# Altium PCB LM-008.PcbDoc (part 1 of 3)
Units mil, origin at the board's own origin, x right, y up, seen from the top; angles counter-clockwise.
Board outline 2639.74 x 2756.53 mil, 2 copper layers (Top Layer, Bottom Layer); 59 components, 36 nets, 707 pads, 397 vias.
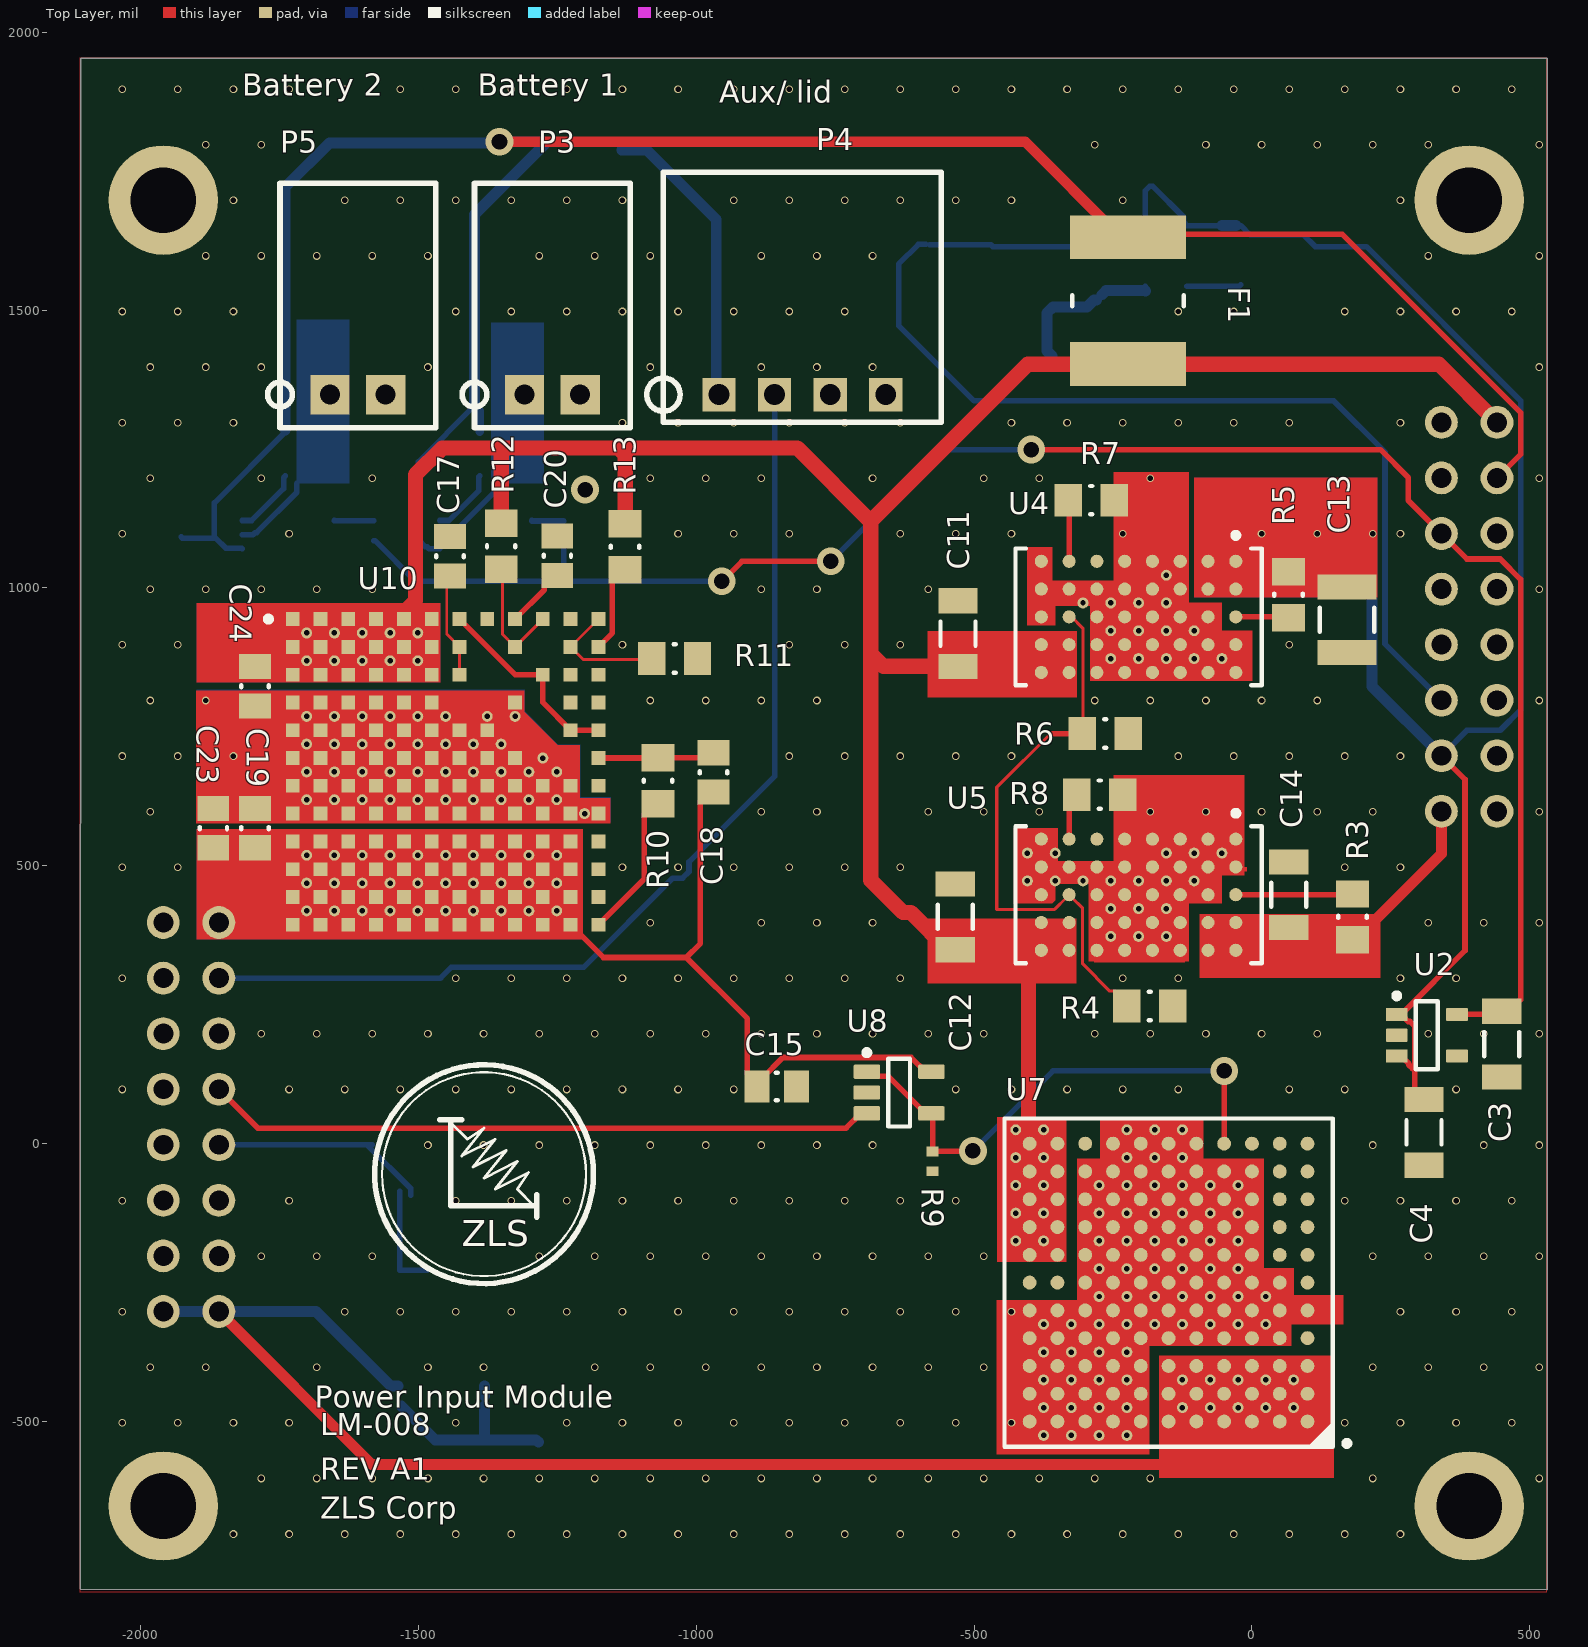
[diagram p0: Top Layer view]
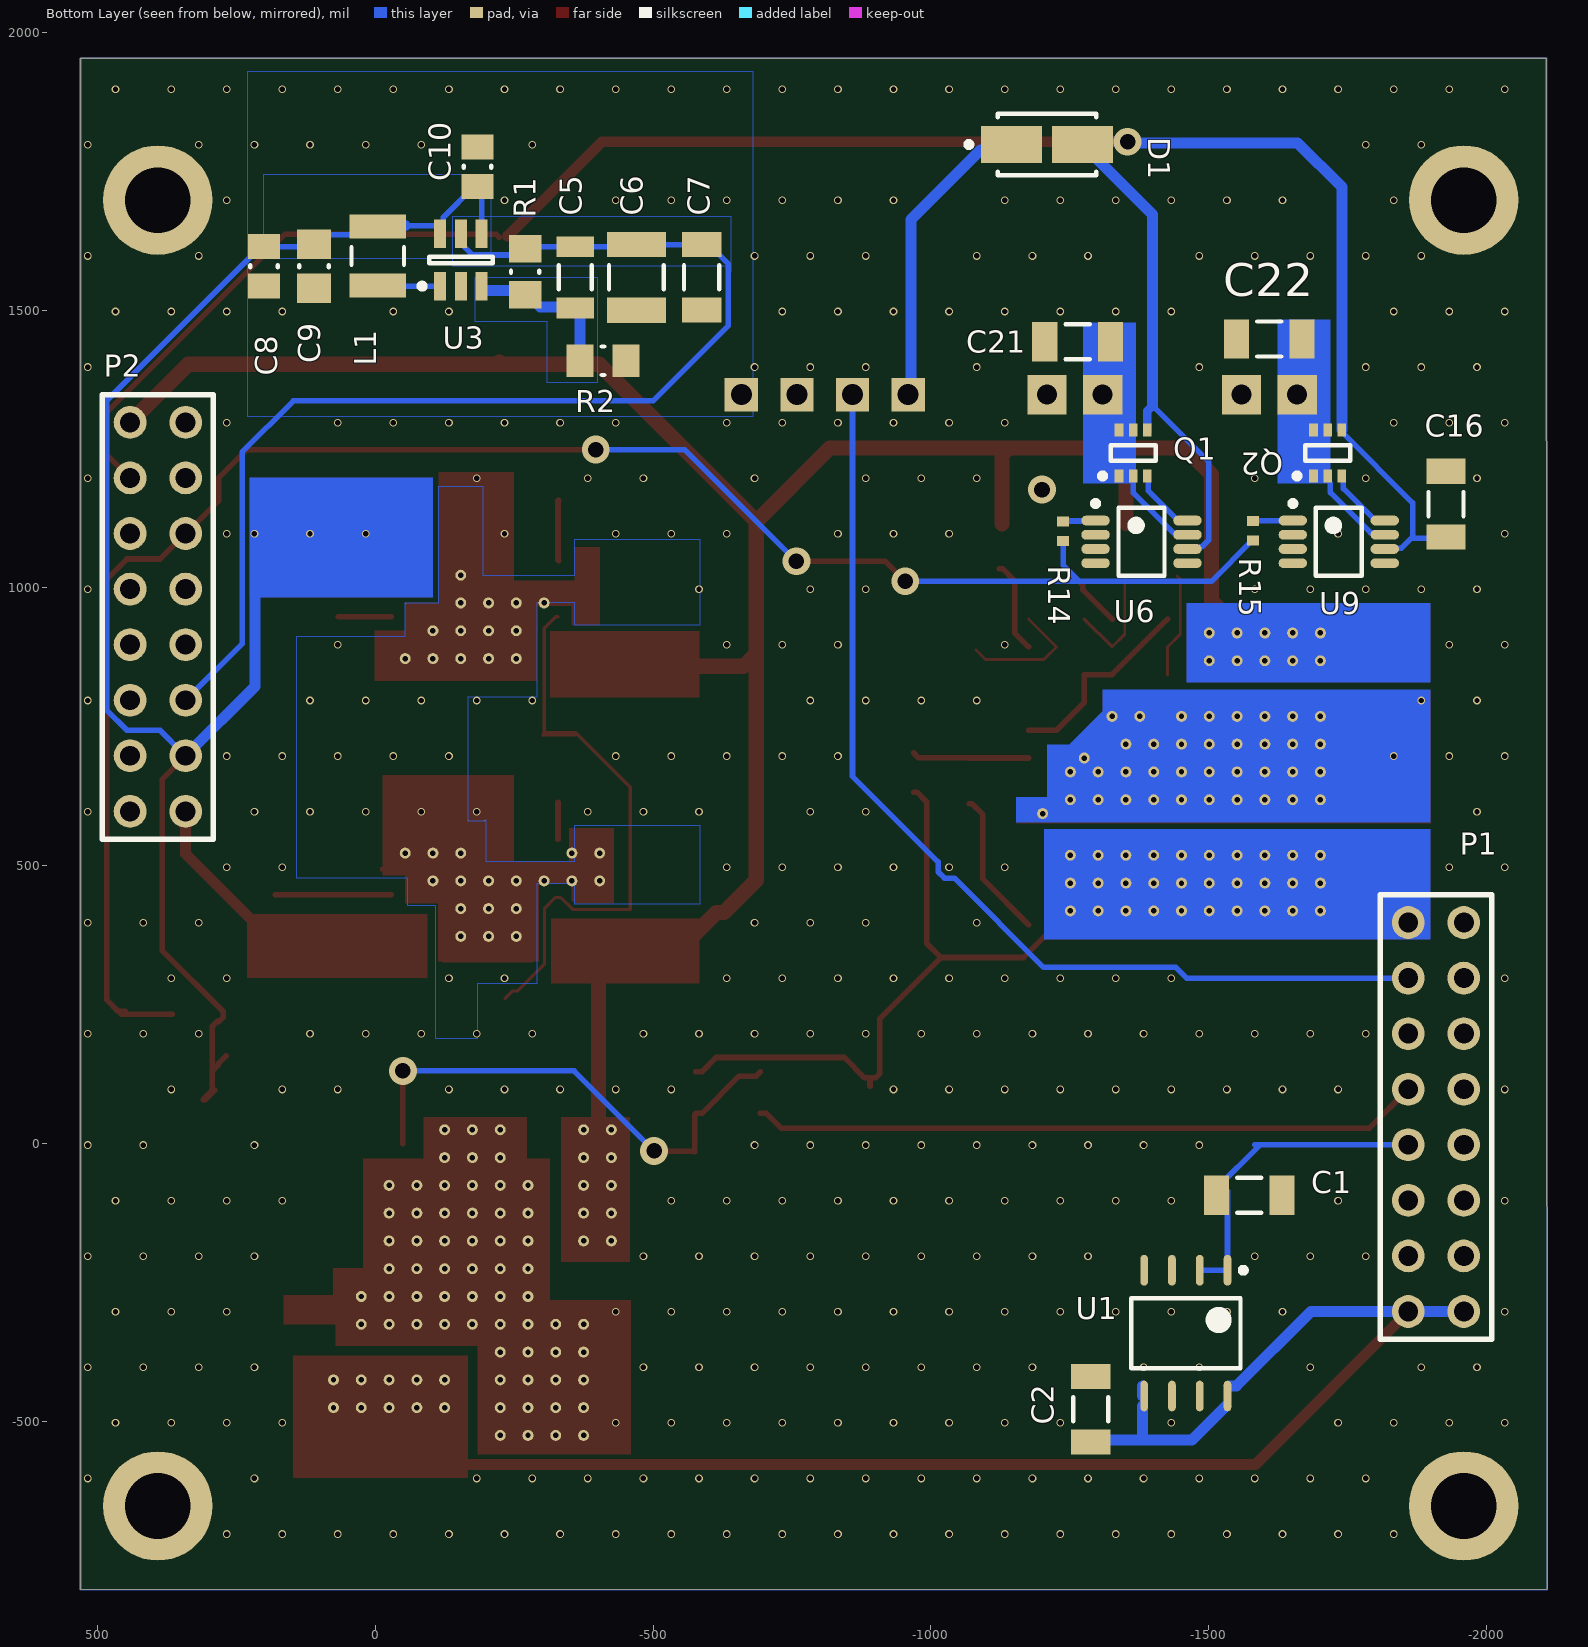
[diagram p1: Bottom Layer view, seen from below]

## Layer stack, top to bottom
Top Solder: solder mask 0.4, Solder Resist, Dk 3.5
Top Layer: signal copper 1.4
Dielectric 1: dielectric 12.6, FR-4, Dk 4.8
Bottom Layer: signal copper 1.4
Bottom Solder: solder mask 0.4, Solder Resist, Dk 3.5

## Board outline
-2108.74,-802 531,-803 531,1953.53 -2107.74,1953.43

## Design rules (kind name [scope] priority, off if disabled: settings)
Clearance Clearance_2 [InNamedPolygon('NONET_L02_P014')] p1: gap=3 ignorepadtopadclearanceinfootprint=FALSE except(0: Arc-Hole Track-Hole SMDPad-Hole THPad-Hole Via-Hole Fill-Hole Poly-Hole Region-Hole Text-Hole; 10: Arc-Text Track-Text SMDPad-Text THPad-Text Via-Text Fill-Text Poly-Text Region-Text Text-Text)
Clearance Clearance_1 [InNamedPolygon('NONET_L01_P002')] p2: gap=5 ignorepadtopadclearanceinfootprint=FALSE
Clearance [All] p3: gap=7.87 ignorepadtopadclearanceinfootprint=TRUE except(3.94: SMDPad-SMDPad)
HoleSize [All] p1: absolutevalues=TRUE maxlimit=196.85 minlimit=1 maxpercent=80.000 minpercent=20.000
MinimumSolderMaskSliver [All] p1: minsoldermaskwidth=1.46
PlaneConnect [All] p1: planeconnectstyle=Direct reliefexpansion=20 reliefentries=4 reliefconductorwidth=10 reliefairgap=10
PolygonConnect [All] p1: connectstyle=Relief reliefconductorwidth=10 reliefentries=4 polygonreliefangle="90 Angle" airgapwidth=10
RoutingVias [All] p1: holewidth=28 width=50 viastyle="Through Hole" minholewidth=28 minwidth=50 maxholewidth=28 maxwidth=50
SilkToSilkClearance [All] p1: silktosilkclearance=7.87
SilkToSolderMaskClearance [IsPad] p1: minsilkscreentomaskgap=6.89 clearancetoexposedcopper=TRUE
SolderMaskExpansion [All] p1: expansion=4
Width [All] p1: maxlimit=39.37 minlimit=5 preferedwidth=10
25 further rules are at their usual default settings.

## Classes and differential pairs
component class LM-008: C1 C2 C3 C4 P1 P2 U1 U2
component class 36V_Supply: C5 C6 C7 C8 C9 C10 L1 R1 R2 U3
component class Power_Input_FET: C16 C21 C22 D1 F1 P3 P4 P5 Q1 Q2 R14 R15 RL2 RL? U6 U9
component class 5R_Supply: C11 C12 C13 C14 R3 R4 R5 R6 R7 R8 U4 U5
component class 12_Supply: C15 R9 U7 U8
component class BBB-Supply: C17 C18 C19 C20 C23 C24 R10 R11 R12 R13 U10

## Components (designator, comment, footprint, x,y, rotation, side; value= is the part's Value field where it differs from the comment)
C1 "CAP CER 1UF 50V X7R 1210" CAPC1206(3216)130_N -1573,-93 r0 bottom
C2 "CAP CER 1UF 50V X7R 1210" CAPC1206(3216)130_N -1288,-478 r270 bottom
C3 "CAP CER 1UF 50V X7R 1210" CAPC1206(3216)130_N 449.74,179.24 r90 top
C4 "CAP CER 1UF 50V X7R 1210" CAPC1206(3216)130_N 309.74,20.19 r90 top
C5 "22pF" CAPC1206(3216)170_L -360,1558.94 r90 bottom
C6 "CAP CER 1UF 50V X7R 1210" CAPC1210(3225)100_N -470,1558.94 r90 bottom
C7 "CAP CER 0.47UF 50V X7R 1206" CAPC1206(3216)190_N -587.35,1559.22 r90 bottom
C8 "CAP CER 1UF 16V X7R 0805" CAPC0805(2012)145_N 200,1578.94 r90 bottom
C9 "4.7uF" CAPC0805(2012)145_M 110,1578.94 r90 bottom
C10 "CAP CER 0.047UF 16V X7R 0603" CAPC0805(2012)145_N -184,1758 r270 bottom
C11 "" CAPC1206(3216)110_N -529,918 r270 top value=4.7uF
C12 "CAP CER 10UF 6.3V X5R 1206" CAPC1206(3216)130_N -534,408 r270 top
C13 "" CAPC1210(3225)100_N 171,943 r270 top value=100uF
C14 "CAP CER 10UF 6.3V X5R 1206" CAPC1206(3216)130_N 66,448 r270 top
C15 "CAP CER 0.1UF 16V X7R 0805" CAPC0805(2012)145_N -855,103 r0 top
C16 "CAP CER 10UF 6.3V X5R 1206" CAPC1206(3216)130_N -1927,1151 r270 bottom
C17 "CAP CER 0.1UF 16V X7R 0805" CAPC0805(2012)145_N -1443,1057 r270 top
C18 "CAP CER 0.1UF 16V X7R 0805" CAPC0805(2012)145_N -969,668 r270 top
C19 "CAP CER 0.1UF 16V X7R 0805" CAPC0805(2012)145_N -1794,568 r270 top
C20 "CAP CER 0.1UF 16V X7R 0805" CAPC0805(2012)145_N -1250,1058 r270 top
C21 "CAP CER 10UF 6.3V X5R 1206" CAPC1206(3216)130_N -1264,1443 r180 bottom
C22 "CAP CER 10UF 6.3V X5R 1206" CAPC1206(3216)130_N -1609,1448 r180 bottom
C23 "CAP CER 0.1UF 16V X7R 0805" CAPC0805(2012)145_N -1869,568 r270 top
C24 "CAP CER 0.1UF 16V X7R 0805" CAPC0805(2012)145_N -1794,823 r90 top
D1 "CDBA540-HF" VISH-DO-214AC-2_M -1209,1798 r180 bottom
F1 "PCT" CAPC7451X12N -223,1517 r270 top
L1 "47uH" C1210 -4.67,1597.61 r270 bottom
P1 "TLW-108-05-G-D" TLW-108-05-G-D -1909,48 r270 bottom
P2 "TLW-108-05-G-D" TLW-108-05-G-D 391,948 r270 bottom
P3 "IPL1-102-01-F-S-RA-K" IPL1-102-01-F-S-RA-K -1309,1348 r0 top
P4 "IPL1-104-01-L-S-RA-K" IPL1-104-01-L-S-RA-K -959,1348 r0 top
P5 "IPL1-102-01-F-S-RA-K" IPL1-102-01-F-S-RA-K -1659,1348 r0 top
Q1 "MCH6336-TL-E" ONSC-MCPH-6_V -1364,1243 r90 bottom
Q2 "MCH6336-TL-E" ONSC-MCPH-6_V -1714,1243 r90 bottom
R1 "RES SMD 280K OHM 1% 1/8W 0805" RESC0805(2012)_M -270,1568.94 r270 bottom
R2 "RES SMD 10K OHM 1% 1/8W 0805" RESC0805(2012)_M -410,1408.94 r180 bottom
R3 "RES SMD 43K OHM 1% 1/8W 0805" RESC0805(2012)_M 181,408 r270 top
R4 "RES SMD 43K OHM 1% 1/8W 0805" RESC0805(2012)_M -184,248 r180 top
R5 "" RESC0805(2012)_M 66,988 r270 top
R6 "RES SMD 43K OHM 1% 1/8W 0805" RESC0805(2012)_M -264,738 r180 top
R7 "RES SMD 43K OHM 1% 1/8W 0805" RESC0805(2012)_M -289,1158 r180 top
R8 "RES SMD 43K OHM 1% 1/8W 0805" RESC0805(2012)_M -274,628 r180 top
R9 "1M" RESC0402(1005)_L -575,-32 r90 top
R10 "RES SMD 43K OHM 1% 1/8W 0805" RESC0805(2012)_M -1069,653 r270 top
R11 "RES SMD 43K OHM 1% 1/8W 0805" RESC0805(2012)_M -1039,873 r180 top
R12 "RES SMD 43K OHM 1% 1/8W 0805" RESC0805(2012)_M -1351,1075 r270 top
R13 "RES SMD 43K OHM 1% 1/8W 0805" RESC0805(2012)_M -1128,1074 r270 top
R14 "560k" RESC0402(1005)_L -1238,1102 r270 bottom
R15 "560k" RESC0402(1005)_L -1580,1103 r270 bottom
U1 "BD90GA3WEFJ-E2" TSOP127P600X100-8N -1458.76,-340.91 r270 bottom
U2 "TLV70233DBVR" DBV0005A_N 314.74,195.19 r0 top
U3 "LT3461" LT-S6-6-TSOT-23_N -154.25,1590.36 r90 bottom
U4 "LTM8045MPY#PBF" LT-BGA-40-11250X6250X4920 -204,948 r270 top
U5 "LTM8045MPY#PBF" LT-BGA-40-11250X6250X4920 -204,448 r270 top
U6 "LTC4414EMS8#TRPBF" LT-MS8-8_L -1379,1083 r180 bottom
U7 "LTM8055IY" LT-BGA-121-15000X15000X4920 -150,-250 r180 top
U8 "OPA188AIDBVR" DBV0005A_M -635,92 r0 top
U9 "LTC4414EMS8#TRPBF" LT-MS8-8_L -1734,1083 r180 bottom
U10 "LTM4612EV#PBF" LT-LGA-133-05-08-1766_V -1451,669 r0 top

## Footprints (in the part's own frame and the unit in brackets; to place one, negate y for a bottom-side part, rotate by r counter-clockwise, add the part's x,y. Pads: shape width x height; smd on the part's side, far side on the other; paste and mask are expansions set on the pad)
C1210 [mm] "Chip Capacitor, Body 3.2x2.5mm, IPC High Density"
  rect 1.1x2.6 smd: 1(-1.35,0) 2(1.35,0)
  silkscreen extent -0.4,-1.2 0.4,1.2, body extent -1.7,-1.35 1.7,1.35, height 1.3
CAPC0805(2012)145_M [mm] "Chip Capacitor, Body 2.0x1.2mm, Height 1.45mm, IPC Low Density"
  rect 1.35x1.55 smd: 1(-1,0) 2(1,0)
  silkscreen extent -0.05,-0.67 0.05,0.68, body extent -1.1,-0.72 1.1,0.72, height 1.45
CAPC0805(2012)145_N [mm] "Chip Capacitor, Body 2.0x1.2mm, Height 1.45mm, IPC Medium Density"
  rect 1.15x1.45 smd: 1(-0.9,0) 2(0.9,0)
  silkscreen extent -0.05,-0.62 0.05,0.62, body extent -1.1,-0.72 1.1,0.73, height 1.45
CAPC1206(3216)110_N [mm] "Chip Capacitor, Body 3.2x1.6mm, Height 1.1mm, IPC Medium Density"
  rect 1.15x1.8 smd: 1(-1.5,0) 2(1.5,0)
  silkscreen extent -0.55,-0.8 0.55,0.8, body extent -1.7,-0.9 1.7,0.9, height 1.1
CAPC1206(3216)130_N [mm] "Chip Capacitor, Body 3.2x1.6mm, Height 1.3mm, IPC Medium Density"
  rect 1.15x1.8 smd: 1(-1.5,0) 2(1.5,0)
  silkscreen extent -0.55,-0.8 0.55,0.8, body extent -1.7,-0.9 1.7,0.9, height 1.3
CAPC1206(3216)170_L [mm] "Chip Capacitor, Body 3.2x1.6mm, Height 1.7mm, IPC High Density"
  rect 0.95x1.7 smd: 1(-1.4,0) 2(1.4,0)
  silkscreen extent -0.55,-0.75 0.55,0.75, body extent -1.7,-0.9 1.7,0.9, height 1.7
CAPC1206(3216)190_N [mm] "Chip Capacitor, Body 3.2x1.6mm, Height 1.9mm, IPC Medium Density"
  rect 1.15x1.8 smd: 1(-1.5,0) 2(1.5,0)
  silkscreen extent -0.55,-0.8 0.55,0.8, body extent -1.7,-0.9 1.7,0.9, height 1.9
CAPC1210(3225)100_N [mm] "Chip Capacitor, Body 3.2x2.5mm, Height 1mm, IPC Medium Density"
  rect 1.15x2.7 smd: 1(-1.5,0) 2(1.5,0)
  silkscreen extent -0.55,-1.25 0.55,1.25, body extent -1.7,-1.35 1.7,1.35, height 1
CAPC7451X12N [mm] "Chip Capacitor, 2-Leads, Body 7.36x5.12mm, IPC Medium Density"
  rect 2x5.3 smd: 1(-2.9,0) 2(2.9,0)
  silkscreen extent -0.25,-2.55 0.25,2.55, body extent -3.99,-2.72 3.99,2.72, height 1.25
DBV0005A_M [mm] "SOT23, 5-Leads, Body 3.05x1.75mm, Pitch 0.95mm, IPC Low Density"
  rrect15% 1.2x0.65 smd: 1(-1.475,0.95) 2(-1.475,0) 3(-1.475,-0.95) 4(1.475,-0.95) 5(1.475,0.95)
  silkscreen extent -1.6,-1.55 0.5,1.95, body extent -1.42,-1.46 1.42,1.46, height 1.08
DBV0005A_N [mm] "SOT23, 5-Leads, Body 3.05x1.75mm, Pitch 0.95mm, IPC Medium Density"
  rrect17% 1x0.6 smd: 1(-1.375,0.95) 2(-1.375,0) 3(-1.375,-0.95) 4(1.375,-0.95) 5(1.375,0.95)
  silkscreen extent -1.5,-1.55 0.5,1.92, body extent -1.42,-1.46 1.42,1.46, height 1.08
IPL1-102-01-F-S-RA-K [mm] ".100 TERMINAL ASSEMBLY"
  rect 1.8x1.8 hole 0.91: 1(0,0) 2(2.54,0)
  silkscreen extent -2.85,-1.52 4.83,9.65, body extent -2.03,-0.25 4.57,9.4, height 6.56
IPL1-104-01-L-S-RA-K [mil]
  rect 60x60 hole 37.4: 1(0,0) 2(100,0) 3(200,0) 4(300,0)
  silkscreen extent -130,-50 400,400, body extent -80,-12 380,380, height 258
LT-BGA-40-11250X6250X4920 [mm] "BGA, 40-Balls, Body 11.25x6.25mm, Pitch 1.27mm"
  round 0.6 smd: A1(-2.54,4.445) A2(-1.27,4.445) A3(0,4.445) A4(1.27,4.445) A5(2.54,4.445) B1(-2.54,3.175) B2(-1.27,3.175) B3(0,3.175) B4(1.27,3.175) B5(2.54,3.175) C1(-2.54,1.905) C2(-1.27,1.905) C3(0,1.905) C4(1.27,1.905) C5(2.54,1.905) D1(-2.54,0.635) D2(-1.27,0.635) D3(0,0.635) D4(1.27,0.635) D5(2.54,0.635) E1(-2.54,-0.635) E2(-1.27,-0.635) E3(0,-0.635) E4(1.27,-0.635) E5(2.54,-0.635) F1(-2.54,-1.905) F2(-1.27,-1.905) F3(0,-1.905) F4(1.27,-1.905) F5(2.54,-1.905) G1(-2.54,-3.175) G2(-1.27,-3.175) G3(0,-3.175) G4(1.27,-3.175) G5(2.54,-3.175) H1(-2.54,-4.445) H2(-1.27,-4.445) H3(0,-4.445) H4(1.27,-4.445) H5(2.54,-4.445)
  silkscreen extent -3.85,-5.63 3.13,5.63, body extent -3.13,-5.63 3.13,5.63, height 5.12
LT-BGA-121-15000X15000X4920 [mil] "BGA, 121-Balls, Body 15x15mm, Pitch 1.27mm"
  round 25 smd: A1(-250,250) A2(-200,250) A3(-150,250) A4(-100,250) A5(-50,250) A6(0,250) A7(50,250) A8(100,250) A9(150,250) A10(200,250) A11(250,250) B1(-250,200) B2(-200,200) B3(-150,200) B4(-100,200) B5(-50,200) B6(0,200) B7(50,200) B8(100,200) B9(150,200) B10(200,200) B11(250,200) C1(-250,150) C2(-200,150) C3(-150,150) C4(-100,150) C5(-50,150) C6(0,150) C7(50,150) C8(100,150) C9(150,150) C10(200,150) C11(250,150) D1(-250,100) D2(-200,100) D3(-150,100) D4(-100,100) D5(-50,100) D6(0,100) D7(50,100) D8(100,100) D9(150,100) D10(200,100) D11(250,100) E1(-250,50) E2(-200,50) E3(-150,50) E4(-100,50) E5(-50,50) E6(0,50) E7(50,50) E8(100,50) E9(150,50) E10(200,50) E11(250,50) F1(-250,0) F2(-200,0) F3(-150,0) F4(-100,0) F5(-50,0) F6(0,0) F7(50,0) F8(100,0) F9(150,0) F10(200,0) F11(250,0) G1(-250,-50) G2(-200,-50) G3(-150,-50) G4(-100,-50) G5(-50,-50) G6(0,-50) G7(50,-50) G8(100,-50) G9(150,-50) G10(200,-50) G11(250,-50) H1(-250,-100) H2(-200,-100) H3(-150,-100) H4(-100,-100) H5(-50,-100) H6(0,-100) H7(50,-100) H8(100,-100) H9(150,-100) H10(200,-100) H11(250,-100) J1(-250,-150) J2(-200,-150) J3(-150,-150) J4(-100,-150) J5(-50,-150) J6(0,-150) J7(50,-150) J8(100,-150) J9(150,-150) J10(200,-150) J11(250,-150) K1(-250,-200) K2(-200,-200) K3(-150,-200) K4(-100,-200) K5(-50,-200) K6(0,-200) K7(50,-200) K8(100,-200) K9(150,-200) K10(200,-200) K11(250,-200) L1(-250,-250) L2(-200,-250) L3(-150,-250) L4(-100,-250) L5(-50,-250) L6(0,-250) L7(50,-250) L8(100,-250) L9(150,-250) L10(200,-250) L11(250,-250)
  silkscreen extent -326,-295 295,295, body extent -295,-295 295,295, height 202
LT-LGA-133-05-08-1766_V [mm] "LGA, 133-Leads, Body 15x15mm, Pitch 1.27mm"
  rect 0.63x0.63 smd: A1(-6.985,6.985) A2(-5.715,6.985) A3(-4.445,6.985) A4(-3.175,6.985) A5(-1.905,6.985) A6(-0.635,6.985) A7(0.635,6.985) A8(1.905,6.985) A9(3.175,6.985) A10(4.445,6.985) A11(5.715,6.985) A12(6.985,6.985) B1(-6.985,5.715) B2(-5.715,5.715) B3(-4.445,5.715) B4(-3.175,5.715) B5(-1.905,5.715) B6(-0.635,5.715) B7(0.635,5.715) B9(3.175,5.715) B11(5.715,5.715) B12(6.985,5.715) C1(-6.985,4.445) C2(-5.715,4.445) C3(-4.445,4.445) C4(-3.175,4.445) C5(-1.905,4.445) C6(-0.635,4.445) C7(0.635,4.445) C10(4.445,4.445) C11(5.715,4.445) C12(6.985,4.445) D1(-6.985,3.175) D2(-5.715,3.175) D3(-4.445,3.175) D4(-3.175,3.175) D5(-1.905,3.175) D6(-0.635,3.175) D9(3.175,3.175) D11(5.715,3.175) D12(6.985,3.175) E1(-6.985,1.905) E2(-5.715,1.905) E3(-4.445,1.905) E4(-3.175,1.905) E5(-1.905,1.905) E6(-0.635,1.905) E7(0.635,1.905) E8(1.905,1.905) E11(5.715,1.905) E12(6.985,1.905) F1(-6.985,0.635) F2(-5.715,0.635) F3(-4.445,0.635) F4(-3.175,0.635) F5(-1.905,0.635) F6(-0.635,0.635) F7(0.635,0.635) F8(1.905,0.635) F9(3.175,0.635) F12(6.985,0.635) G1(-6.985,-0.635) G2(-5.715,-0.635) G3(-4.445,-0.635) G4(-3.175,-0.635) G5(-1.905,-0.635) G6(-0.635,-0.635) G7(0.635,-0.635) G8(1.905,-0.635) G9(3.175,-0.635) G10(4.445,-0.635) G11(5.715,-0.635) G12(6.985,-0.635) H1(-6.985,-1.905) H2(-5.715,-1.905) H3(-4.445,-1.905) H4(-3.175,-1.905) H5(-1.905,-1.905) H6(-0.635,-1.905) H7(0.635,-1.905) H8(1.905,-1.905) H9(3.175,-1.905) H10(4.445,-1.905) H11(5.715,-1.905) H12(6.985,-1.905) J1(-6.985,-3.175) J2(-5.715,-3.175) J3(-4.445,-3.175) J4(-3.175,-3.175) J5(-1.905,-3.175) J6(-0.635,-3.175) J7(0.635,-3.175) J8(1.905,-3.175) J9(3.175,-3.175) J10(4.445,-3.175) J11(5.715,-3.175) J12(6.985,-3.175) K1(-6.985,-4.445) K2(-5.715,-4.445) K3(-4.445,-4.445) K4(-3.175,-4.445) K5(-1.905,-4.445) K6(-0.635,-4.445) K7(0.635,-4.445) K8(1.905,-4.445) K9(3.175,-4.445) K10(4.445,-4.445) K11(5.715,-4.445) K12(6.985,-4.445) L1(-6.985,-5.715) L2(-5.715,-5.715) L3(-4.445,-5.715) L4(-3.175,-5.715) L5(-1.905,-5.715) L6(-0.635,-5.715) L7(0.635,-5.715) L8(1.905,-5.715) L9(3.175,-5.715) L10(4.445,-5.715) L11(5.715,-5.715) L12(6.985,-5.715) M1(-6.985,-6.985) M2(-5.715,-6.985) M3(-4.445,-6.985) M4(-3.175,-6.985) M5(-1.905,-6.985) M6(-0.635,-6.985) M7(0.635,-6.985) M8(1.905,-6.985) M9(3.175,-6.985) M10(4.445,-6.985) M11(5.715,-6.985) M12(6.985,-6.985)
  silkscreen extent -8.22,6.86 -7.97,7.11, body extent -7.5,-7.5 7.5,7.5, height 2.92
LT-MS8-8_L [mm] "SOP, 8-Leads, Body 3.1x3.1mm, Pitch 0.65mm, IPC High Density"
  oval 1.3x0.45 smd: 1(-2.1,0.975) 2(-2.1,0.325) 3(-2.1,-0.325) 4(-2.1,-0.975) 5(2.1,-0.975) 6(2.1,-0.325) 7(2.1,0.325) 8(2.1,0.975)
  silkscreen extent -2.23,-1.55 1.05,1.87, body extent -1.55,-1.55 1.55,1.55, height 1.1
LT-S6-6-TSOT-23_N [mm] "SOT23, 6-Leads, Body 2.9x1.75mm, Pitch 0.95mm, IPC Medium Density"
  rect 1.3x0.55 smd: 1(-1.2,0.95) 2(-1.2,0) 3(-1.2,-0.95) 4(1.2,-0.95) 5(1.2,0) 6(1.2,0.95)
  silkscreen extent -1.32,-1.45 0.15,1.9, body extent -0.87,-1.45 0.87,1.45, height 1
ONSC-MCPH-6_V [mm] "SOT23, 6-Leads, Body 2x1.6mm, Pitch 0.65mm"
  rect 0.6x0.4 smd: 1(-1.05,0.65) 2(-1.05,0) 3(-1.05,-0.65) 4(1.05,-0.65) 5(1.05,0) 6(1.05,0.65)
  silkscreen extent -1.17,-1.03 0.35,1.53, body extent -0.8,-1 0.8,1, height 0.9
RESC0402(1005)_L [mm] "Chip Resistor, Body 1.0x0.5mm, IPC High Density"
  rect 0.45x0.55 smd: 1(-0.45,0) 2(0.45,0)
  body extent -0.52,-0.27 0.53,0.28, height 0.4
RESC0805(2012)_M [mm] "Chip Resistor, Body 2.0x1.3mm, IPC Low Density"
  rect 1.25x1.5 smd: 1(-1.05,0) 2(1.05,0)
  silkscreen extent -0.05,-0.65 0.05,0.65, body extent -1.1,-0.67 1.1,0.67, height 0.7
TLW-108-05-G-D [mm]
  round 1.5 hole 0.91: 1(-8.89,-1.27) 2(-8.89,1.27) 3(-6.35,-1.27) 4(-6.35,1.27) 5(-3.81,-1.27) 6(-3.81,1.27) 7(-1.27,-1.27) 8(-1.27,1.27) 9(1.27,-1.27) 10(1.27,1.27) 11(3.81,-1.27) 12(3.81,1.27) 13(6.35,-1.27) 14(6.35,1.27) 15(8.89,-1.27) 16(8.89,1.27)
  silkscreen extent -10.16,-2.54 10.16,2.54, body extent -10.16,-2.51 10.16,2.51, height 6.35
TSOP127P600X100-8N [mm] "TSOP, 8-Leads, Body 4.90x3.90mm, Pitch 1.27mm, IPC Medium Density"
  oval 1.4x0.35 smd: 1(-2.875,1.905) 2(-2.875,0.635) 3(-2.875,-0.635) 4(-2.875,-1.905) 5(2.875,-1.905) 6(2.875,-0.635) 7(2.875,0.635) 8(2.875,1.905)
  silkscreen extent -3,-2.5 1.6,2.75, body extent -2,-2.5 2,2.5, height 1
VISH-DO-214AC-2_M [mm] "DO-214AC, 2-Leads, Body 4.5x2.79mm, IPC Low Density"
  rect 2.8x1.7 smd: 1(-1.625,0) 2(1.625,0)
  silkscreen extent -3.7,-1.4 2.25,1.4, body extent -2.25,-1.39 2.25,1.4, height 2.29

## Part data
C1 C2 C3 C4: library part CMP-1037-04913-1, Capacitance=1µF, Manufacturer="Murata Electronics North America", Manufacturer Part Number=GRM32RR71H105KA01L, Operating Temperature="-55°C ~ 125°C", Package / Case="1210 (3225 Metric)", Ratings=-, Supplier Part Number 1=490-1863-6-ND, Temperature Coefficient=X7R, Tolerance=±10%, Voltage - Rated=50V, Applications="General Purpose", Category=Capacitors, ComponentLink1Description=http://search.murata.co.jp/Ceramy/image/img/A01X/G101/ENG/GRM32RR71H105KA01-01.pdf, ComponentLink1URL=http://search.murata.co.jp/Ceramy/image/img/A01X/G101/ENG/GRM32RR71H105KA01-01.pdf, Features=-, Height - Seated (Max)=-, Lead Spacing=-, Lead Style=-, Mounting Type="Surface Mount, MLCC", Packaging=Digi-Reel®, Part Status=Active, Pricing 1="1=0.35, 10=0.242, 100=0.1449, 500=0.10868 (USD)", RoHS="RoHS Compliant", Size / Dimension="0.126\" L x 0.098\" W (3.20mm x 2.50mm)", Stock 1=66890, Supplier 1=Digi-Key, Thickness (Max)="0.079\" (2.00mm)"
C5: library part CMP-1037-04573-1, "CAP CER 22PF 50V C0G/NP0 1206", Manufacturer=KEMET, Manufacturer Part Number=C1206C220K5GACTU, Operating Temperature="-55°C ~ 125°C", Package / Case="1206 (3216 Metric)", Ratings=-, Supplier Part Number 1=399-8165-1-ND, Temperature Coefficient="C0G, NP0", Tolerance=±10%, Voltage - Rated=50V, Applications="General Purpose", Category=Capacitors, ComponentLink1Description=http://www.kemet.com/docfinder?Partnumber=C1206C220K2GACTU, ComponentLink1URL=http://www.kemet.com/docfinder?Partnumber=C1206C220K2GACTU, Failure Rate=-, Features="Low ESL", Height - Seated (Max)=-, Lead Spacing=-, Lead Style=-, Mounting Type="Surface Mount, MLCC", Packaging="Cut Tape (CT)", Part Status=Active, Pricing 1="1=0.18, 10=0.128, 100=0.06, 500=0.04208, 1000=0.03483 (USD)", RoHS="RoHS Compliant", Size / Dimension="0.126\" L x 0.063\" W (3.20mm x 1.60mm)", Stock 1=35613, Supplier 1=Digi-Key, Thickness (Max)="0.035\" (0.88mm)"
C6: library part CMP-1038-01123-1, Capacitance=1µF, Manufacturer="Taiyo Yuden", Manufacturer Part Number=UMK325B7105KH-T, Operating Temperature="-55°C ~ 125°C", Package / Case="1210 (3225 Metric)", Ratings=-, Supplier Part Number 1=587-1366-1-ND, Temperature Coefficient=X7R, Tolerance=±10%, Voltage - Rated=50V, Applications="General Purpose", Category=Capacitors, ComponentLink1Description=http://www.yuden.co.jp/productdata/catalog/en/mlcc_all_e.pdf, ComponentLink1URL=http://www.yuden.co.jp/productdata/catalog/en/mlcc_all_e.pdf, Features=-, Height - Seated (Max)=-, Lead Spacing=-, Lead Style=-, Mounting Type="Surface Mount, MLCC", Packaging="Cut Tape (CT)", Part Status=Active, Pricing 1="1=0.36, 10=0.247, 100=0.1398, 500=0.0987, 1000=0.08637 (USD)", RoHS="RoHS Compliant", Size / Dimension="0.126\" L x 0.098\" W (3.20mm x 2.50mm)", Stock 1=23864, Supplier 1=Digi-Key, Thickness (Max)="0.063\" (1.60mm)"
C7: library part CMP-1037-04570-1, Capacitance=0.47µF, Manufacturer="Taiyo Yuden", Manufacturer Part Number=UMK316B7474KL-T, Operating Temperature="-55°C ~ 125°C", Package / Case="1206 (3216 Metric)", Ratings=-, Supplier Part Number 1=587-1325-1-ND, Temperature Coefficient=X7R, Tolerance=±10%, Voltage - Rated=50V, Applications="General Purpose", Category=Capacitors, ComponentLink1Description=http://www.yuden.co.jp/productdata/catalog/en/mlcc_all_e.pdf, ComponentLink1URL=http://www.yuden.co.jp/productdata/catalog/en/mlcc_all_e.pdf, Features=-, Height - Seated (Max)=-, Lead Spacing=-, Lead Style=-, Mounting Type="Surface Mount, MLCC", Packaging="Cut Tape (CT)", Part Status=Active, Pricing 1="1=0.3, 10=0.203, 100=0.115, 500=0.08114, 1000=0.071 (USD)", RoHS="RoHS Compliant", Size / Dimension="0.126\" L x 0.063\" W (3.20mm x 1.60mm)", Stock 1=8658, Supplier 1=Digi-Key, Thickness (Max)="0.071\" (1.80mm)"
C8: library part CMP-1036-04795-1, Capacitance=1µF, Manufacturer="Taiyo Yuden", Manufacturer Part Number=EMK212B7105KG-T, Operating Temperature="-55°C ~ 125°C", Package / Case="0805 (2012 Metric)", Ratings=-, Supplier Part Number 1=587-1283-1-ND, Temperature Coefficient=X7R, Tolerance=±10%, Voltage - Rated=16V, Applications="General Purpose", Category=Capacitors, ComponentLink1Description=http://ds.yuden.co.jp/TYCOMPAS/ut/detail.do?productNo=EMK212B7105KG-T&fileName=EMK212B7105KG-T_SS&mode=specSheetDownload, ComponentLink1URL=http://ds.yuden.co.jp/TYCOMPAS/ut/detail.do?productNo=EMK212B7105KG-T&fileName=EMK212B7105KG-T_SS&mode=specSheetDownload, Features=-, Height - Seated (Max)=-, Lead Spacing=-, Lead Style=-, Mounting Type="Surface Mount, MLCC", Packaging="Cut Tape (CT)", Part Status=Active, Pricing 1="1=0.13, 10=0.089, 100=0.042, 1000=0.02439 (USD)", RoHS="RoHS Compliant", Size / Dimension="0.079\" L x 0.049\" W (2.00mm x 1.25mm)", Stock 1=41495, Supplier 1=Digi-Key, Thickness (Max)="0.053\" (1.35mm)"
C9: library part CMP-1036-04750-1, "CAP CER 4.7UF 16V X7R 0805", Manufacturer=KEMET, Manufacturer Part Number=C0805C475K4RACTU, Operating Temperature="-55°C ~ 125°C", Package / Case="0805 (2012 Metric)", Ratings=-, Supplier Part Number 1=399-7415-1-ND, Temperature Coefficient=X7R, Tolerance=±10%, Voltage - Rated=16V, Applications="General Purpose", Category=Capacitors, ComponentLink1Description=http://www.kemet.com/docfinder?Partnumber=C0805C475K4RACTU, ComponentLink1URL=http://www.kemet.com/docfinder?Partnumber=C0805C475K4RACTU, Failure Rate=-, Features="Low ESL", Height - Seated (Max)=-, Lead Spacing=-, Lead Style=-, Mounting Type="Surface Mount, MLCC", Packaging="Cut Tape (CT)", Part Status=Active, Pricing 1="1=0.26, 10=0.176, 100=0.0894, 500=0.06118, 1000=0.05412 (USD)", RoHS="RoHS Compliant", Size / Dimension="0.079\" L x 0.049\" W (2.00mm x 1.25mm)", Stock 1=88820, Supplier 1=Digi-Key, Thickness (Max)="0.055\" (1.40mm)"
C10: library part CMP-1036-04795-1, Capacitance=0.047µF, Manufacturer="Murata Electronics North America", Manufacturer Part Number=GRM188R71C473KA01D, Operating Temperature="-55°C ~ 125°C", Package / Case="0603 (1608 Metric)", Ratings=-, Supplier Part Number 1=490-1529-6-ND, Temperature Coefficient=X7R, Tolerance=±10%, Voltage - Rated=16V, Applications="General Purpose", Category=Capacitors, ComponentLink1Description=http://www.murata.com/~/media/webrenewal/support/library/catalog/products/capacitor/mlcc/c02e.ashx, ComponentLink1URL=http://www.murata.com/~/media/webrenewal/support/library/catalog/products/capacitor/mlcc/c02e.ashx, Features=-, Height - Seated (Max)=-, Lead Spacing=-, Lead Style=-, Mounting Type="Surface Mount, MLCC", Packaging=Digi-Reel®, Part Status=Active, Pricing 1="1=0.1, 10=0.046, 100=0.0206, 500=0.0147, 1000=0.01155 (USD)", RoHS="RoHS Compliant", Size / Dimension="0.063\" L x 0.031\" W (1.60mm x 0.80mm)", Stock 1=26, Supplier 1=Digi-Key, Thickness (Max)="0.035\" (0.90mm)"
C11: library part CMP-1037-04332-1
C12: library part CMP-1037-04913-1, Capacitance=14.7uF, Manufacturer="Taiyo Yuden", Manufacturer Part Number=JMK316BJ106ML-T, Operating Temperature="-55°C ~ 85°C", Package / Case="1206 (3216 Metric)", Ratings=-, Supplier Part Number 1=587-5447-1-ND, Temperature Coefficient=X5R, Tolerance=±20%, Voltage - Rated=6.3V, Applications="SMPS Filtering", Category=Capacitors, ComponentLink1Description=http://ds.yuden.co.jp/TYCOMPAS/ut/detail.do?productNo=JMK316BJ106ML-T&fileName=JMK316BJ106ML-T_SS&mode=specSheetDownload, ComponentLink1URL=http://ds.yuden.co.jp/TYCOMPAS/ut/detail.do?productNo=JMK316BJ106ML-T&fileName=JMK316BJ106ML-T_SS&mode=specSheetDownload, Failure Rate=-, Features=-, Height - Seated (Max)=-, Lead Spacing=-, Lead Style=-, Mounting Type="Surface Mount, MLCC", Notification="Current market demand for these product types have resulted in fluctuating and extending lead times. Lead times may differ.", Packaging="Cut Tape (CT)", Part Status=Active, Pricing 1="1=0.24, 10=0.161, 100=0.0817, 500=0.05592, 1000=0.04946 (USD)", RoHS="RoHS Compliant", Size / Dimension="0.126\" L x 0.063\" W (3.20mm x 1.60mm)", Stock 1=5600, Supplier 1=Digi-Key, Thickness (Max)="0.071\" (1.80mm)"
C13: library part CMP-1038-01331-1
C14 C16: library part CMP-1037-04913-1, Capacitance=22pF, Manufacturer="Taiyo Yuden", Manufacturer Part Number=JMK316BJ106ML-T, Operating Temperature="-55°C ~ 85°C", Package / Case="1206 (3216 Metric)", Ratings=-, Supplier Part Number 1=587-5447-1-ND, Temperature Coefficient=X5R, Tolerance=±20%, Voltage - Rated=6.3V, Applications="SMPS Filtering", Category=Capacitors, ComponentLink1Description=http://ds.yuden.co.jp/TYCOMPAS/ut/detail.do?productNo=JMK316BJ106ML-T&fileName=JMK316BJ106ML-T_SS&mode=specSheetDownload, ComponentLink1URL=http://ds.yuden.co.jp/TYCOMPAS/ut/detail.do?productNo=JMK316BJ106ML-T&fileName=JMK316BJ106ML-T_SS&mode=specSheetDownload, Failure Rate=-, Features=-, Height - Seated (Max)=-, Lead Spacing=-, Lead Style=-, Mounting Type="Surface Mount, MLCC", Notification="Current market demand for these product types have resulted in fluctuating and extending lead times. Lead times may differ.", Packaging="Cut Tape (CT)", Part Status=Active, Pricing 1="1=0.24, 10=0.161, 100=0.0817, 500=0.05592, 1000=0.04946 (USD)", RoHS="RoHS Compliant", Size / Dimension="0.126\" L x 0.063\" W (3.20mm x 1.60mm)", Stock 1=5600, Supplier 1=Digi-Key, Thickness (Max)="0.071\" (1.80mm)"
C15 C18: library part CMP-1036-04795-1, Capacitance=0.1µF, Manufacturer="Murata Electronics North America", Manufacturer Part Number=GRM219R71C104KA01D, Operating Temperature="-55°C ~ 125°C", Package / Case="0805 (2012 Metric)", Ratings=-, Supplier Part Number 1=490-1673-6-ND, Temperature Coefficient=X7R, Tolerance=±10%, Voltage - Rated=25V, Applications="General Purpose", Category=Capacitors, ComponentLink1Description=http://www.murata.com/~/media/webrenewal/support/library/catalog/products/capacitor/mlcc/c02e.ashx, ComponentLink1URL=http://www.murata.com/~/media/webrenewal/support/library/catalog/products/capacitor/mlcc/c02e.ashx, Features=-, Height - Seated (Max)=-, Lead Spacing=-, Lead Style=-, Mounting Type="Surface Mount, MLCC", Packaging=Digi-Reel®, Part Status=Active, Pricing 2="1=0.14, 10=0.098, 100=0.0462, 500=0.0324, 1000=0.02683 (USD)", RoHS="RoHS Compliant", Size / Dimension="0.079\" L x 0.049\" W (2.00mm x 1.25mm)", Stock 2=245331, Supplier 2=Digi-Key, Supplier Part Number 2=490-1683-6-ND, Thickness (Max)="0.053\" (1.35mm)"
C17 C24: library part CMP-1036-04795-1, Capacitance=10uF, Manufacturer="Murata Electronics North America", Manufacturer Part Number=GRM219R71C104KA01D, Operating Temperature="-55°C ~ 125°C", Package / Case="0805 (2012 Metric)", Ratings=-, Supplier Part Number 1=490-1673-6-ND, Temperature Coefficient=X7R, Tolerance=±10%, Voltage - Rated=25V, Applications="General Purpose", Category=Capacitors, ComponentLink1Description=http://www.murata.com/~/media/webrenewal/support/library/catalog/products/capacitor/mlcc/c02e.ashx, ComponentLink1URL=http://www.murata.com/~/media/webrenewal/support/library/catalog/products/capacitor/mlcc/c02e.ashx, Features=-, Height - Seated (Max)=-, Lead Spacing=-, Lead Style=-, Mounting Type="Surface Mount, MLCC", Packaging=Digi-Reel®, Part Status=Active, Pricing 2="1=0.14, 10=0.098, 100=0.0462, 500=0.0324, 1000=0.02683 (USD)", RoHS="RoHS Compliant", Size / Dimension="0.079\" L x 0.049\" W (2.00mm x 1.25mm)", Stock 2=245331, Supplier 2=Digi-Key, Supplier Part Number 2=490-1683-6-ND, Thickness (Max)="0.053\" (1.35mm)"
C19: library part CMP-1036-04795-1, Capacitance=220uF, Manufacturer="Murata Electronics North America", Manufacturer Part Number=GRM219R71C104KA01D, Operating Temperature="-55°C ~ 125°C", Package / Case="0805 (2012 Metric)", Ratings=-, Supplier Part Number 1=490-1673-6-ND, Temperature Coefficient=X7R, Tolerance=±10%, Voltage - Rated=25V, Applications="General Purpose", Category=Capacitors, ComponentLink1Description=http://www.murata.com/~/media/webrenewal/support/library/catalog/products/capacitor/mlcc/c02e.ashx, ComponentLink1URL=http://www.murata.com/~/media/webrenewal/support/library/catalog/products/capacitor/mlcc/c02e.ashx, Features=-, Height - Seated (Max)=-, Lead Spacing=-, Lead Style=-, Mounting Type="Surface Mount, MLCC", Packaging=Digi-Reel®, Part Status=Active, Pricing 2="1=0.14, 10=0.098, 100=0.0462, 500=0.0324, 1000=0.02683 (USD)", RoHS="RoHS Compliant", Size / Dimension="0.079\" L x 0.049\" W (2.00mm x 1.25mm)", Stock 2=245331, Supplier 2=Digi-Key, Supplier Part Number 2=490-1683-6-ND, Thickness (Max)="0.053\" (1.35mm)"
C20: library part CMP-1036-04795-1, Capacitance=.01uF, Manufacturer="Murata Electronics North America", Manufacturer Part Number=GRM219R71C104KA01D, Operating Temperature="-55°C ~ 125°C", Package / Case="0805 (2012 Metric)", Ratings=-, Supplier Part Number 1=490-1673-6-ND, Temperature Coefficient=X7R, Tolerance=±10%, Voltage - Rated=25V, Applications="General Purpose", Category=Capacitors, ComponentLink1Description=http://www.murata.com/~/media/webrenewal/support/library/catalog/products/capacitor/mlcc/c02e.ashx, ComponentLink1URL=http://www.murata.com/~/media/webrenewal/support/library/catalog/products/capacitor/mlcc/c02e.ashx, Features=-, Height - Seated (Max)=-, Lead Spacing=-, Lead Style=-, Mounting Type="Surface Mount, MLCC", Packaging=Digi-Reel®, Part Status=Active, Pricing 2="1=0.14, 10=0.098, 100=0.0462, 500=0.0324, 1000=0.02683 (USD)", RoHS="RoHS Compliant", Size / Dimension="0.079\" L x 0.049\" W (2.00mm x 1.25mm)", Stock 2=245331, Supplier 2=Digi-Key, Supplier Part Number 2=490-1683-6-ND, Thickness (Max)="0.053\" (1.35mm)"
C21 C22: library part CMP-1037-04913-1, Capacitance=.1uF, Manufacturer="Taiyo Yuden", Manufacturer Part Number=JMK316BJ106ML-T, Operating Temperature="-55°C ~ 85°C", Package / Case="1206 (3216 Metric)", Ratings=-, Supplier Part Number 1=587-5447-1-ND, Temperature Coefficient=X5R, Tolerance=±20%, Voltage - Rated=6.3V, Applications="SMPS Filtering", Category=Capacitors, ComponentLink1Description=http://ds.yuden.co.jp/TYCOMPAS/ut/detail.do?productNo=JMK316BJ106ML-T&fileName=JMK316BJ106ML-T_SS&mode=specSheetDownload, ComponentLink1URL=http://ds.yuden.co.jp/TYCOMPAS/ut/detail.do?productNo=JMK316BJ106ML-T&fileName=JMK316BJ106ML-T_SS&mode=specSheetDownload, Failure Rate=-, Features=-, Height - Seated (Max)=-, Lead Spacing=-, Lead Style=-, Mounting Type="Surface Mount, MLCC", Notification="Current market demand for these product types have resulted in fluctuating and extending lead times. Lead times may differ.", Packaging="Cut Tape (CT)", Part Status=Active, Pricing 1="1=0.24, 10=0.161, 100=0.0817, 500=0.05592, 1000=0.04946 (USD)", RoHS="RoHS Compliant", Size / Dimension="0.126\" L x 0.063\" W (3.20mm x 1.60mm)", Stock 1=5600, Supplier 1=Digi-Key, Thickness (Max)="0.071\" (1.80mm)"
C23: library part CMP-1036-04795-1, Capacitance=22uF, Manufacturer="Murata Electronics North America", Manufacturer Part Number=GRM219R71C104KA01D, Operating Temperature="-55°C ~ 125°C", Package / Case="0805 (2012 Metric)", Ratings=-, Supplier Part Number 1=490-1673-6-ND, Temperature Coefficient=X7R, Tolerance=±10%, Voltage - Rated=25V, Applications="General Purpose", Category=Capacitors, ComponentLink1Description=http://www.murata.com/~/media/webrenewal/support/library/catalog/products/capacitor/mlcc/c02e.ashx, ComponentLink1URL=http://www.murata.com/~/media/webrenewal/support/library/catalog/products/capacitor/mlcc/c02e.ashx, Features=-, Height - Seated (Max)=-, Lead Spacing=-, Lead Style=-, Mounting Type="Surface Mount, MLCC", Packaging=Digi-Reel®, Part Status=Active, Pricing 2="1=0.14, 10=0.098, 100=0.0462, 500=0.0324, 1000=0.02683 (USD)", RoHS="RoHS Compliant", Size / Dimension="0.079\" L x 0.049\" W (2.00mm x 1.25mm)", Stock 2=245331, Supplier 2=Digi-Key, Supplier Part Number 2=490-1683-6-ND, Thickness (Max)="0.053\" (1.35mm)"
D1: library part "D Schottky", "DIODE SCHOTTKY 40V 5A DO214AB", Capacitance @ Vr, F="380pF @ 4V, 1MHz", Current - Average Rectified (Io)=5A, Manufacturer="Comchip Technology", Operating Temperature - Junction="-50°C ~ 150°C", Package / Case="DO-214AC, SMA", Supplier Device Package="DO-214AC (SMA)", Supplier Part Number 1=641-1707-6-ND, Category="Discrete Semiconductor Products", ComponentLink1Description=http://www.comchiptech.com/cms/UserFiles/CDBA540-HF%20Thru505315.%20CDBA5200-HF%20RevC.pdf, ComponentLink1URL=http://www.comchiptech.com/cms/UserFiles/CDBA540-HF%20Thru505315.%20CDBA5200-HF%20RevC.pdf, Diode Type=Schottky, Manufacturer Part Number=CDBA540-HF, Mounting Type="Surface Mount", Packaging=Digi-Reel®, Part Status=Active, Pricing 1="1=0.49, 10=0.381, 25=0.3208, 100=0.2612, 250=0.2164, 500=0.1791, 1000=0.13432, 2500=0.12313 (USD)", RoHS="RoHS Compliant", Speed="Fast Recovery =< 500ns, > 200mA (Io)", Stock 1=7367, Supplier 1=Digi-Key
L1: library part Inductor, "FIXED IND 47UH 170MA 1.3 OHM SMD", DC Resistance (DCR)="1.69 Ohm Max", Manufacturer="Murata Electronics North America", Manufacturer Part Number=LQH32CN470K23L, Operating Temperature="-40°C ~ 85°C", Package / Case=Nonstandard, Q @ Freq=-, Supplier Device Package=1210, Supplier Part Number 1=490-2497-1-ND, Tolerance=±10%, Category="Inductors, Coils, Chokes", ComponentLink1Description=http://search.murata.co.jp/Ceramy/image/img/P02/JELF243A-0039.pdf, ComponentLink1URL=http://search.murata.co.jp/Ceramy/image/img/P02/JELF243A-0039.pdf, Height - Seated (Max)="0.067\" (1.70mm)", Material - Core=Ferrite, Mounting Type="Surface Mount", Packaging="Cut Tape (CT)", Part Status=Active, Pricing 1="1=0.33, 10=0.297, 100=0.2043, 500=0.17458, 1000=0.13372 (USD)", Ratings=-, RoHS="RoHS Compliant", Shielding=Unshielded, Size / Dimension="0.126\" L x 0.098\" W (3.20mm x 2.50mm)", Stock 1=1058, Supplier 1=Digi-Key, Type=Wirewound
P1 P2: "CONN HEADER .100\" 16POS DL GOLD", Current Rating="5.2A per Contact", Insulation Color=Black, Manufacturer="Samtec Inc.", Material Flammability Rating=-, Operating Temperature="-55°C ~ 125°C", Supplier Part Number 1=SAM1094-08-ND, Applications=-, Category="Connectors, Interconnects", ComponentLink1Description=http://suddendocs.samtec.com/prints/tlw-mkt.pdf, ComponentLink1URL=http://suddendocs.samtec.com/prints/tlw-mkt.pdf, Connector Type=Header, Contact Finish - Mating=Gold, Contact Finish - Post=Gold, Contact Finish Thickness - Mating="10µin (0.25µm)", Contact Finish Thickness - Post=Flash, Contact Length - Mating="0.105\" (2.67mm)", Contact Length - Post="0.170\" (4.32mm)", Contact Material="Phosphor Bronze", Contact Shape=Square, Contact Type="Male Pin", Fastening Type=Push-Pull, Features=-, Ingress Protection=-, Insulation Height="0.060\" (1.52mm)", Insulation Material="Liquid Crystal Polymer (LCP)", Manufacturer Part Number=TLW-108-05-G-D, Mated Stacking Heights=-, Mounting Type="Through Hole", Number of Positions=16, Number of Positions Loaded=All, Number of Rows=2, Overall Contact Length="0.335\" (8.51mm)", Packaging=Bulk, Part Status=Active, Pitch - Mating="0.100\" (2.54mm)", Pricing 1="1=4.48, 10=4.006, 100=3.2987, 500=2.60756, 1000=2.23842, 5000=2.04207, 10000=1.96353 (USD)", RoHS="RoHS Compliant", Row Spacing - Mating="0.100\" (2.54mm)", Shrouding=Unshrouded, Stock 1=0, Style="Board to Board or Cable", Supplier 1=Digi-Key, Termination=Solder, Voltage Rating=-
P4: Current Rating=-, Insulation Color=Natural, Manufacturer="Samtec Inc.", Material Flammability Rating="UL94 V-0", Operating Temperature="-55°C ~ 125°C", Supplier Part Number 1=SAM9597-ND, Voltage Rating="675VAC, 954VDC", Applications=-, Category="Connectors, Interconnects", ComponentLink1Description=http://suddendocs.samtec.com/prints/ipl1-1xx-xx-xxx-s-xx-x-xx-mkt.pdf, ComponentLink1URL=http://suddendocs.samtec.com/prints/ipl1-1xx-xx-xxx-s-xx-x-xx-mkt.pdf, Connector Type=Header, Contact Finish - Mating=Gold, Contact Finish - Post=Tin, Contact Finish Thickness - Mating="10µin (0.25µm)", Contact Finish Thickness - Post=-, Contact Length - Mating="0.215\" (5.46mm)", Contact Length - Post="0.085\" (2.16mm)", Contact Material="Phosphor Bronze", Contact Shape=Square, Contact Type="Male Pin", Fastening Type="Locking Ramp", Features=-, Ingress Protection=-, Insulation Height="0.240\" (6.10mm)", Insulation Material="Liquid Crystal Polymer (LCP)", Manufacturer Part Number=IPL1-104-01-L-S-RA-K, Mated Stacking Heights=-, Mounting Type="Through Hole, Right Angle", Number of Positions=4, Number of Positions Loaded=All, Number of Rows=1, Overall Contact Length=-, Packaging=Tube, Part Status=Active, Pitch - Mating="0.100\" (2.54mm)", Pricing 1="1=2.53, 10=2.424, 100=2.02, 500=1.717, 1000=1.4645, 5000=1.313 (USD)", RoHS="RoHS Compliant", Row Spacing - Mating=-, Shrouding="Shrouded - 4 Wall", Stock 1=265, Style="Board to Cable/Wire", Supplier 1=Digi-Key, Termination=Solder
Q1 Q2: library part CMP-1058-00598-1, "P-Channel Power MOSFET, -12 V, -5 A, 43 mOhm, Single, 6-Pin MCPH, Pb-Free, Tape and Reel", Manufacturer="On Semiconductor", Package Type="SC-88FL / MCPH-6", Channel Polarity="P Channel", Ciss Typ (pF)=660, ComponentLink1Description="Manufacturer URL", ComponentLink1URL=http://www.onsemi.com/, ComponentLink2Description=Datasheet, ComponentLink2URL=http://www.onsemi.cn/pub_link/Collateral/MCH6336-D.PDF, ComponentLink3Description="Package Specification", ComponentLink3URL=http://www.onsemi.com/pub_link/Collateral/ENA1601-D.PDF, Configuration=Single, Coss Typ (pF)=210, Crss Typ (pF)=155, ID Max (A)=5, Mounting Technology="Surface Mount", PackageDescription="6-Pin Small Outline Transistor, Body 2 x 1.6 mm, Pitch 0.65 mm", PackageReference=MCPH-6, Packing="Tape and Reel", PartNumber=MCH6336-TL-E, PD Max (W)=1.5, RoHS=Pb-Free, V(BR)DSS Min (V)=12, VGS(th) Max (V)=1.4, VGS Max (V)=10
R1: library part CMP-1013-00017-1, Manufacturer="Vishay Dale", Manufacturer Part Number=CRCW0805280KFKEA, Operating Temperature="-55°C ~ 155°C", Package / Case="0805 (2012 Metric)", Power (Watts)="0.125W, 1/8W", Resistance (Ohms)=280k, Supplier Device Package=0805, Supplier Part Number 1=541-280KCTR-ND, Temperature Coefficient=±100ppm/°C, Tolerance=±1%, Category=Resistors, ComponentLink1Description=http://www.vishay.com/docs/20035/dcrcwe3.pdf, ComponentLink1URL=http://www.vishay.com/docs/20035/dcrcwe3.pdf, Composition="Thick Film", Failure Rate=-, Features="Automotive AEC-Q200", Height - Seated (Max)="0.020\" (0.50mm)", Packaging="Tape & Reel (TR)", Part Status=Active, Pricing 1="5000=0.00546, 10000=0.00474, 25000=0.00417, 50000=0.00382, 125000=0.00375 (USD)", RoHS="RoHS Compliant", Size / Dimension="0.079\" L x 0.049\" W (2.00mm x 1.25mm)", Stock 1=10000, Supplier 1=Digi-Key
R2: library part CMP-1013-00017-1, Manufacturer=Yageo, Manufacturer Part Number=RC0805FR-0710KL, Operating Temperature="-55°C ~ 155°C", Package / Case="0805 (2012 Metric)", Power (Watts)="0.125W, 1/8W", Resistance (Ohms)=10k, Supplier Device Package=0805, Supplier Part Number 1=311-10.0KCRCT-ND, Temperature Coefficient=±100ppm/°C, Tolerance=±1%, Category=Resistors, ComponentLink1Description=http://www.yageo.com/documents/recent/PYu-RC_Group_51_RoHS_L_7.pdf, ComponentLink1URL=http://www.yageo.com/documents/recent/PYu-RC_Group_51_RoHS_L_7.pdf, Composition="Thick Film", Failure Rate=-, Features="Moisture Resistant", Height - Seated (Max)="0.024\" (0.60mm)", Packaging="Cut Tape (CT)", Part Status=Active, Pricing 1="1=0.1, 10=0.022, 100=0.0088, 1000=0.00396, 2500=0.00344 (USD)", RoHS="RoHS Compliant", Size / Dimension="0.079\" L x 0.049\" W (2.00mm x 1.25mm)", Stock 1=13336570, Supplier 1=Digi-Key
R3 R6 R7 R8: library part CMP-1013-00017-1, "RES SMD 10K OHM 1% 1/8W 0805", Resistance (Ohms)=130k
R4: library part CMP-1013-00017-1, "RES SMD 10K OHM 1% 1/8W 0805", Resistance (Ohms)=115k
R5: library part CMP-1013-00017-1, Resistance (Ohms)=45.3k
R9 R14 R15: library part CMP-1011-00927-1, Supplier Device Package=0402, Supplier Part Number 1=YAG3220CT-ND, Temperature Coefficient=±100ppm/°C, Tolerance=±1%
R10: library part CMP-1013-00017-1, "RES SMD 10K OHM 1% 1/8W 0805", Resistance (Ohms)=13.7k
R11: library part CMP-1013-00017-1, "RES SMD 10K OHM 1% 1/8W 0805", Resistance (Ohms)=392k
R12: library part CMP-1013-00017-1, "RES SMD 10K OHM 1% 1/8W 0805", Resistance (Ohms)=10k
R13: library part CMP-1013-00017-1, "RES SMD 10K OHM 1% 1/8W 0805", Resistance (Ohms)=3M
U1: "IC REG LDO 9V 0.3A 8HTSOP-J", Current - Limit (Min)=-, Current - Output=300mA, Manufacturer="Rohm Semiconductor", Operating Temperature="-25°C ~ 85°C", Package / Case="8-SOIC (0.154\", 3.90mm Width) Exposed Pad", Supplier Device Package=8-HTSOP-J, Supplier Part Number 1=BD90GA3WEFJ-E2CT-ND, Voltage - Dropout (Typical)="0.6V @ 300mA", Voltage - Input="Up to 14V", Voltage - Output=9V, Category="Integrated Circuits (ICs)", ComponentLink1Description=http://rohmfs.rohm.com/en/products/databook/datasheet/ic/power/linear_regulator/bdxxga3wefj-e.pdf, ComponentLink1URL=http://rohmfs.rohm.com/en/products/databook/datasheet/ic/power/linear_regulator/bdxxga3wefj-e.pdf, Manufacturer Part Number=BD90GA3WEFJ-E2, Mounting Type="Surface Mount", Packaging="Cut Tape (CT)", Part Status=Active, Pricing 1="1=0.69, 10=0.606, 25=0.5364, 100=0.4672, 250=0.40664, 500=0.34608, 1000=0.27686 (USD)", Regulator Topology="Positive Fixed", RoHS="RoHS Compliant", Stock 1=4781, Supplier 1=Digi-Key
U2: library part CMP-0394-00528-2, "Single Output LDO, 300 mA, Fixed 3.3 V Output, 2 to 5.5 V Input, with Low IQ, 5-pin SOT-23 (DBV), -40 to 125 degC, Green (RoHS & no Sb/Br)", Manufacturer="Texas Instruments", Accuracy(%)=2, Code_JEDEC=MO-178, ComponentLink1Description="Manufacturer URL", ComponentLink1URL=http://www.ti.com/, ComponentLink2Description=Datasheet, ComponentLink2URL=http://www.ti.com/general/docs/lit/getliterature.tsp?genericPartNumber=TLV70233&fileType=pdf, ComponentLink3Description="Package Specification", ComponentLink3URL=http://www.ti.com/litv/pdf/mpds018i, DatasheetVersion=SLVSAG6B, Eco-Plan="Green (RoHS & no Sb/Br)", Fixed Output Options(V)=3.3, Iout(Max)(A)=0.3, Iq(Typ)(mA)=0.03, Mounting Technology="Surface Mount", PackageDescription="5-Pin Plastic Small Outline, Body 1.60 Ã— 2.90 mm, Pitch 0.95 mm", PackageReference=DBV0005A, PackageVersion=4073253-4/K, PartNumber=TLV70233DBVR, SubFamily="Single Channel LDO", Vdo(Typ)(mV)=220, Vin(Max)(V)=5.5, Vin(Min)(V)=2, Vout Adj(Max)(V)=3.3, Vout Adj(Min)(V)=3.3
U3: library part CMP-0491-01698-1, "IC REG BOOST ADJ 0.3A TSOT23-6", Current - Output="300mA (Switch)", Frequency - Switching=3MHz, Manufacturer 1="Linear Technology", Manufacturer Part Number 1=LT3461AES6#TRMPBF, Operating Temperature="0°C ~ 70°C (TA)", Package / Case="SOT-23-6 Thin, TSOT-23-6", Supplier Device Package=TSOT-23-6, Supplier Part Number 1=LT3461AES6#TRMPBFCT-ND, Voltage - Input (Max)=16V, Voltage - Input (Min)=2.5V, Voltage - Output (Max)=38V, Voltage - Output (Min/Fixed)=1.255V, Category 1="Integrated Circuits (ICs)", ComponentLink1Description=http://www.linear.com/docs/3469, ComponentLink1URL=http://www.linear.com/docs/3469, Description 1="IC REG BOOST ADJ 0.3A TSOT23-6", Function=Step-Up, Mounting Type="Surface Mount", Number of Outputs=1, Output Configuration=Positive, Output Type=Adjustable, Packaging="Cut Tape (CT)", Part Status=Active, Pricing 1="1=3.94, 25=3.52, 100=2.4, 250=2.2 (USD)", RoHS 1="RoHS Compliant", Stock 1=1325, Supplier 1=Digi-Key, Synchronous Rectifier=No, Topology=Boost
U4 U5: library part CMP-0483-00032-1, "Inverting or SEPIC uModule DC/DC Converter with Up to 700 mA Output Current, 40-pin BGA, -55 to 125 degC, Pb-Free, Tray", Extended Temp="E, I, MP", Frequency(kHz)=2000, Frequency Adjust Range="200kHz - 2MHz", Manufacturer="Linear Technology", Switch Current(A)=3, Code_JEDEC=MS-028, ComponentLink1Description="Manufacturer URL", ComponentLink1URL=http://www.linear.com/, ComponentLink2Description=Datasheet, ComponentLink2URL=http://cds.linear.com/docs/en/datasheet/8045fa.pdf, ComponentLink3Description="Package Specification", ComponentLink3URL=http://cds.linear.com/docs/en/packaging/BGA_40_05-08-1867.pdf, DatasheetVersion="Rev. A", Frequency Sync Range="200kHz - 2MHz", Ishutdown(uA)=1, Isupply(mA)=10, Mounting Technology="Surface Mount", Number of Outputs=1, PackageDescription="40-Ball BGA, Body 11.25 x 6.25 mm, Pitch 1.27 mm", PackageReference=BGA-40, PackageVersion="Rev. Ø, 08/2010", Packing=Tray, PartId=1, PartNumber=LTM8045MPY#PBF, RoHS=TRUE, Synchronous=no, Topology="Sepic, Inverting", Tracking=no, Vin Max(V)=18, Vin Min(V)=2.8, Vout Max(V)=18, Vswitch Max(V)=18
U6 U9: library part CMP-0479-00214-1, "Low Loss PowerPath Controller for Large PFET, 3 to 36 V Vin, 8-pin SOP (MS8-8), -40 to 85 degC, Pb-Free, Tape and Reel", Manufacturer="Linear Technology", ComponentLink1Description="Manufacturer URL", ComponentLink1URL=http://www.linear.com/, ComponentLink2Description=Datasheet, ComponentLink2URL=http://cds.linear.com/docs/en/datasheet/4414fc.pdf, ComponentLink3Description="Package Specification", ComponentLink3URL=http://cds.linear.com/docs/en/packaging/05081660_G_MS8.pdf, DatasheetVersion="Rev. C", Ideal Diode="Single, External, P-Channel", Mounting Technology="Surface Mount", PackageDescription="8-Pin Plastic MSOP, Body 3 x 3 mm, Pitch 0.65 mm", PackageReference=MS8-8, PackageVersion="Rev. G, 03/2012", Packing="Tape and Reel", PartNumber=LTC4414EMS8#TRPBF, RoHS=TRUE
U7: library part CMP-2000-06614-1, "Buck-Boost uModule Regulator, 8.5 A, 5 to 36 V, -40 to 125 degC, 121-Ball BGA, RoHS, Tray", Current - Output (Max)=8.5A, Manufacturer=LinearTechnology, Operating Temperature=-40°C~125°C, Package / Case=121-BGA, Package Description="121-Ball BGA, Body 15 x 15 mm, Pitch 1.27 mm", Package Reference=BGA-121, Package Version="Rev. A, 11/2012", Power (Watts) - Manufacture Series=-, Voltage - Input (Max)=36V, Voltage - Input (Min)=5V, Voltage - Output 1=1.2~36V, Applications=ITE(Commercial), Category=PowerSupplies-BoardMount, Datasheet URL=http://cds.linear.com/docs/en/datasheet/8055fa.pdf, Datasheet Version="Rev. A, 01/2016", Efficiency=97.5%, Family=DCDCConverters, Features=OTP, Manufacturer URL=http://www.linear.com/, Mounting Technology=SurfaceMount, Mounting Type=SurfaceMount, Number of Outputs=1, Package URL=http://www.linear.com/docs/41075, Packaging=Tray, PartId=1, Power (Watts) - Max=-, Series=µModule®, Type=Non-IsolatedPoLModule, Voltage - Isolation=-, Voltage - Output 2=-, Voltage - Output 3=-
U8: library part CMP-0809-00005-2, "Precision, Low Noise, Rail-to-Rail Output, Zero-Drift Operational Amplifier, 4 to 36 V, -40 to 125 degC, 5-pin SOT23 (DBV5), Green (RoHS & no Sb/Br)", Manufacturer="Texas Instruments", Rating=Catalog, Total Supply Voltage(Max)(+5V is 5, +/-5V is 10)=36, Total Supply Voltage(Min)(+5V is 5, +/-5V is 10)=4, CMRR(Min)(dB)=120, Code_JEDEC=MO-178, ComponentLink1Description="Manufacturer URL", ComponentLink1URL=http://www.ti.com/, ComponentLink2Description=Datasheet, ComponentLink2URL=http://www.ti.com/lit/ds/symlink/opa188.pdf, ComponentLink3Description="Package Specification", ComponentLink3URL=http://www.ti.com/litv/pdf/mpds018i, DatasheetVersion=SBOS642A, Eco-Plan="Green (RoHS & no Sb/Br)", GBW(Typ)(MHz)=2, Iq per channel(Max)(mA)=0.51, Mounting Technology="Surface Mount", Number of Channels=1, Offset Drift(Typ)(uV/C)=0.03, PackageDescription="5-Pin Plastic Small Outline, Body 1.6 x 2.9 mm, Pitch 0.95 mm", PackageReference=DBV0005A, PackageVersion="4073253-4/K, 03/2006", PartNumber=OPA188AIDBVR, Slew Rate(Typ)(V/us)=0.8, SubFamily="Zero Drift Precision Amplifier"
U10: library part CMP-0483-00080-1, "EN55022B Compliant 36 VIN, 15 VOUT, 5 A, DC/DC uModule Regulator, 133-pin LGA, -40 to 125 degC, Pb-Free, Tray", Extended Temp="E, I, MP", Frequency(kHz)=940, Frequency Sync Range="200kHz - 1.3MHz", Manufacturer="Linear Technology", Output Current(A)=5, Switch Current(A)=9, Code_JEDEC=MO-222, ComponentLink1Description="Manufacturer URL", ComponentLink1URL=http://www.linear.com/, ComponentLink2Description=Datasheet, ComponentLink2URL=http://cds.linear.com/docs/en/datasheet/4612fb.pdf, ComponentLink3Description="Package Specification", ComponentLink3URL=http://cds.linear.com/docs/en/packaging/05081766_A_lga133.pdf, DatasheetVersion="Rev. B", Ishutdown(uA)=50, Isupply(mA)=4.5, Mounting Technology="Surface Mount", Number of Outputs=1, PackageDescription="133-Pin LGA, Body 15 x 15 mm, Pitch 1.27 mm", PackageReference=LGA-133, PackageVersion="Rev. A, 02/2013", Packing=Tray, PartId=1, PartNumber=LTM4612EV#PBF, RoHS=TRUE, Synchronous=yes, Topology=Buck, Tracking=yes, Vin Max(V)=36, Vin Min(V)=5, Vout Max(V)=15, Vout Min(V)=3.3

## Free pads (board coordinates)
  round 196.85 hole 118.11: 3(2979.54,-5651.14) ""(-1959,-652) ""(-1959,1698) ""(391,-652) ""(391,1698)